# Altium PCB ArduinoUnoR0.PcbDoc (part 2 of 2)
Units mm, origin at the board's own origin, x right, y up, seen from the top; angles counter-clockwise.
Board outline 68.53 x 53.3 mm, 2 copper layers (Top Layer, Bottom Layer); 60 components, 49 nets, 220 pads, 58 vias.
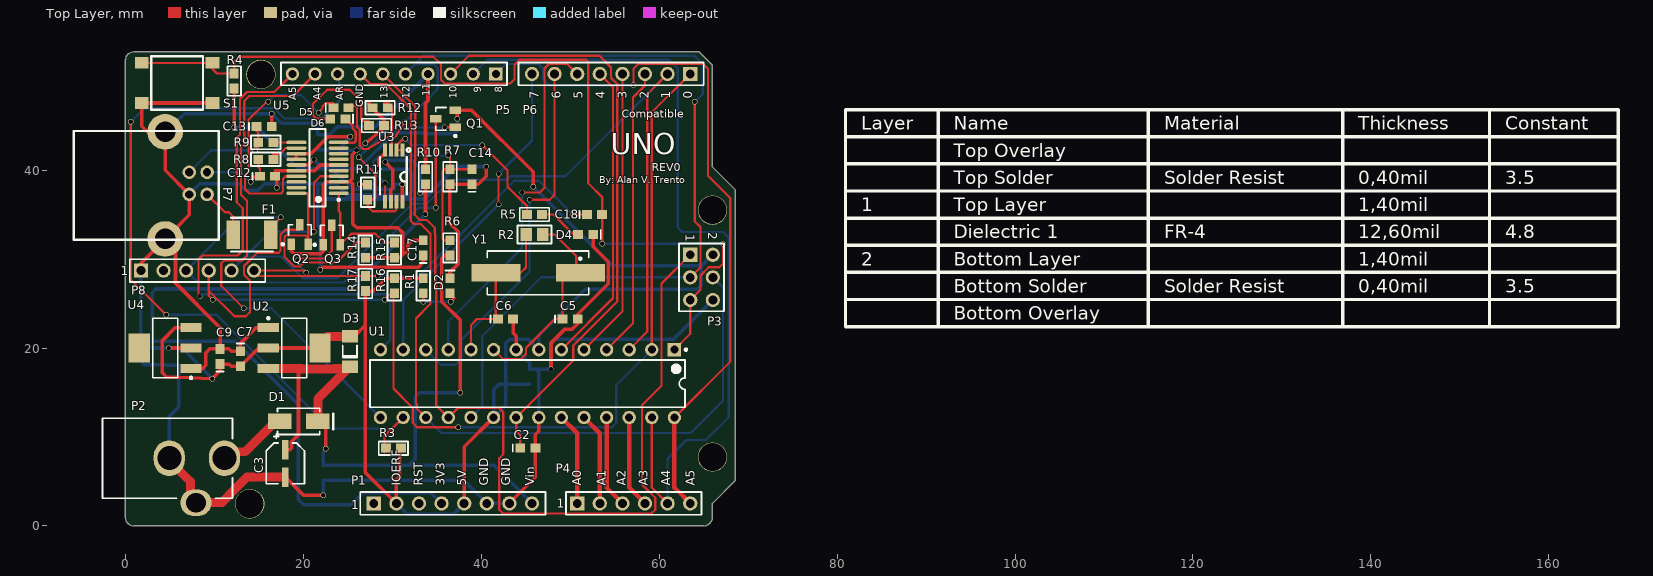
[diagram p0: Top Layer view]

## Via types
v1: diameter 0.61, hole 0.508, Top Layer to Bottom Layer, 58 vias

## Nets (pads, with @x,y where several pads share a name; then routed paths per layer and width w, separated by ;. In a path a pad name is that pad's centre, name@x,y a point inside that pad or via, vN(x,y) a via of type N, cw(c..) or ccw(c..) an arc to the next point about the centre after c; other vN are vias at no path point) (continued)
NetQ2_2: (continued)
  Top Layer w0.254: U5.20 20.473,37.393 20.577,37.289 20.577,32.422 20.58,32.419 20.58,32.34 ; Q2.2 20.58,32.34 ; R14.2 25.985,31.85 23.746,29.611 20.047,29.611 19.609,29.173 18.997,29.173 17.908,30.262 17.908,32.523 18.035,32.65 20.27,32.65 20.58,32.34
NetQ3_2: Q3.2 R15.1 U5.1 | length 12.9
  Top Layer w0.254: U5.1 24,35.401 24.17,35.231 Q3.2 25.423,32.853 28.119,32.853 29.122,31.85 R15.1
NetR5_1: R5.1 U3.1 U3.2 | length 21.3
  Top Layer w0.254: U3.1 U3.2 30.598,42.873 31.157,43.432 31.432,43.432 v1(31.5,43.5) ; v1(40.135,42.81) 42.979,39.965 42.979,38.121 45.15,35.951 R5.1
  Bottom Layer w0.254: v1(31.5,43.5) 32.19,42.81 v1(40.135,42.81)
NetR8_1: R8.1 U5.12 | length 3.5
  Top Layer w0.254: R8.1 16.657,41.844 17.407,41.844 18.035,42.473 U5.12
NetR9_1: R9.1 U5.11 | length 2.6
  Top Layer w0.254: R9.1 U5.11
R\S\T\: C18.2 P3.5 R4.2 S1.2 U1.1 | length 106.6
  Top Layer w0.254: S1.2@1.867,52.034 9.817,52.034 9.817,51.352 10.313,50.856 R4.2 12.25,52.239 12.752,52.741 34.621,52.741 35.485,51.877 35.485,50.15 35.917,49.718 43.283,49.718 43.765,50.201 43.765,51.827 44.32,52.381 51.817,52.381 52.046,52.152 52.046,38.517 53.6,36.963 C18.2 v1(53.6,31.71) ; U1.1 63.5,21.59 P3.5 64.644,26.544 64.644,28.138 65.573,29.067 66.776,29.067 67.184,29.475 v1(67.184,31.71)
  Bottom Layer w0.254: v1(53.6,31.71) v1(67.184,31.71)
RST: P1.3
USB+: F1.2 P8.3 Q1.3 | length 57.6
  Top Layer w0.254: F1.2 16.35,33.53 v1(17.502,34.682) ; v1(34.901,35.764) Q1.3
  Bottom Layer w0.254: v1(17.502,34.682) 12.838,34.682 P8.3 8.187,27.373 24.57,27.373 32.961,35.764 v1(34.901,35.764)
pads on no net: P1.1 P8.2 U4.4 U5.2 U5.5 U5.7 U5.8 U5.9 U5.18 U5.19

## Other copper
Top Layer:

## Silkscreen, mask and mechanical layers (free items; w line width, h text height)
Top Overlay:
  lines w0.381: 80.949,25.454 91.36,25.454 114.976,25.454 136.814,25.454 153.32,25.454 167.794,25.454 ; 80.949,28.502 91.36,28.502 114.976,28.502 136.814,28.502 153.32,28.502 167.794,28.502 ; 80.949,31.55 91.36,31.55 114.976,31.55 136.814,31.55 153.32,31.55 167.794,31.55 ; 80.949,34.598 91.36,34.598 114.976,34.598 136.814,34.598 153.32,34.598 167.794,34.598 ; 80.949,37.646 91.36,37.646 114.976,37.646 136.814,37.646 153.32,37.646 167.794,37.646 ; 80.949,40.694 91.36,40.694 114.976,40.694 136.814,40.694 153.32,40.694 167.794,40.694 ; 80.949,43.742 167.794,43.742 ; 91.36,46.79 91.36,22.406 ; 114.976,46.79 114.976,22.406 ; 136.814,46.79 136.814,22.406 ; 153.32,46.79 153.32,22.406 ; 91.36,22.406 80.949,22.406 80.949,46.79 167.794,46.79 167.794,22.406 153.32,22.406 ; 91.36,22.406 114.976,22.406 ; 114.976,22.406 136.814,22.406 ; 136.814,22.406 153.32,22.406
  text "9" at 39.996,48.67 h0.8 r90
  text "8" at 42.356,48.67 h0.8 r90
  text "11" at 34.246,48.271 h0.8 r90
  text "13" at 29.496,48.004 h0.8 r90
  text "12" at 31.996,48.004 h0.8 r90
  text "10" at 37.246,48.004 h0.8 r90
  text "7" at 46.496,48.004 h1 r90
  text "6" at 48.96,48.004 h1 r90
  text "5" at 51.425,48.004 h1 r90
  text "4" at 53.889,48.004 h1 r90
  text "3" at 56.353,48.004 h1 r90
  text "2" at 58.817,48.004 h1 r90
  text "1" at 61.282,48.004 h1 r90
  text "0" at 63.746,48.004 h1 r90
  text "A5" at 19.246,47.871 h0.8 r90
  text "A4" at 21.996,47.871 h0.8 r90
  text "AR" at 24.496,47.871 h0.8 r90
  text "GND" at 26.746,47.071 h0.8 r90
  text "Compatible" at 55.78,45.521 h1.52
  text "Layer" at 82.727,44.504 h1.52
  text "Name" at 93.138,44.504 h1.52
  text "Material" at 116.754,44.504 h1.52
  text "Thickness" at 138.592,44.504 h1.52
  text "Constant" at 155.098,44.504 h1.52
  text "Top Overlay" at 93.138,41.456 h1.52
  text "UNO" at 54.554,41 h4
  text "REV0" at 59.165,39.517 h1.52
  text "Top Solder" at 93.138,38.408 h1.52
  text "Solder Resist" at 116.754,38.408 h1.52
  text "0,40mil" at 138.592,38.408 h1.52
  text "3.5" at 155.098,38.408 h1.52
  text "By: Alan V. Trento" at 53.25,38.244 h1.3
  text "1" at 82.727,35.36 h1.52
  text "Top Layer" at 93.138,35.36 h1.52
  text "1,40mil" at 138.592,35.36 h1.52
  text "Dielectric 1" at 93.138,32.312 h1.52
  text "FR-4" at 116.754,32.312 h1.52
  text "12,60mil" at 138.592,32.312 h1.52
  text "4.8" at 155.098,32.312 h1.52
  text "2" at 82.727,29.264 h1.52
  text "Bottom Layer" at 93.138,29.264 h1.52
  text "1,40mil" at 138.592,29.264 h1.52
  text "Bottom Solder" at 93.138,26.216 h1.52
  text "Solder Resist" at 116.754,26.216 h1.52
  text "0,40mil" at 138.592,26.216 h1.52
  text "3.5" at 155.098,26.216 h1.52
  text "Bottom Overlay" at 93.138,23.168 h1.52
  text "IOERF" at 30.96,4.504 h1 r90
  text "RST" at 33.425,4.504 h1 r90
  text "3V3" at 35.889,4.504 h1 r90
  text "5V" at 38.353,4.504 h1 r90
  text "GND" at 40.817,4.504 h1 r90
  text "GND" at 43.282,4.504 h1 r90
  text "Vin" at 45.996,4.504 h1 r90
  text "A0" at 51.246,4.504 h1 r90
  text "A1" at 53.996,4.504 h1 r90
  text "A2" at 56.246,4.504 h1 r90
  text "A3" at 58.746,4.504 h1 r90
  text "A4" at 61.246,4.504 h1 r90
  text "A5" at 63.996,4.504 h1 r90
Mechanical 2:
  drawing of 724 lines, arcs and shapes, not listed
Mechanical 3:
  the board outline again, w0.013
Mechanical 4:
  circle w0.006: c0,5.078 r0.003
  circle w0.006: c68.535,5.078 r0.003
  circle w0.006: c0.994,0 r0.003
  circle w0.006: c0.994,53.3 r0.003
Mechanical 15:
  the board outline again, w0.508
Drill Drawing:
  circle w0.254: c84.306,63.61 r0.847
  lines w0.254: 83.459,55.99 84.306,55.143 85.153,55.99 84.306,56.837 83.459,55.99 ; 83.459,59.377 83.883,59.377 83.883,58.953 84.729,58.953 84.729,59.377 85.153,59.377 85.153,60.223 84.729,60.223 84.729,60.647 83.883,60.647 83.883,60.223 83.459,60.223 83.459,59.377 ; 83.459,66.573 84.306,66.997 85.153,66.573 84.729,67.42 85.153,68.267 84.306,67.843 83.459,68.267 83.883,67.42 83.459,66.573 ; 83.459,72.077 85.153,72.077 84.306,70.383 83.459,72.077 ; 83.459,74.193 85.153,74.193 85.153,75.887 83.459,75.887 83.459,74.193 ; 83.459,78.427 83.883,78.427 84.306,78.003 84.729,78.427 85.153,78.427 84.729,78.85 85.153,79.273 84.729,79.273 84.306,79.697 83.883,79.273 83.459,79.273 83.883,78.85 83.459,78.427 ; 83.459,81.813 85.153,81.813 85.153,83.507 83.459,83.507 83.459,81.813 ; 83.798,82.152 84.814,82.152 84.814,83.168 83.798,83.168 83.798,82.152
  lines w0.381: 81.94,54 271.677,54 ; 81.94,84.48 271.677,84.48 ; 95.933,50.19 95.933,88.29 ; 110.915,50.19 110.915,88.29 ; 140.624,50.19 140.624,88.29 ; 153.473,50.19 153.473,88.29 ; 172.112,50.19 172.112,88.29 ; 210.2,50.19 210.2,88.29 ; 225.183,50.19 225.183,88.29 ; 244.126,50.19 244.126,88.29 ; 81.94,50.19 271.677,50.19 271.677,88.29 81.94,88.29 81.94,50.19
  text "Symbol" at 84.226,85.623 h1.83
  text "Count" at 97.076,85.623 h1.83
  text "Hole Size" at 112.058,85.623 h1.83
  text "Plated" at 141.767,85.623 h1.83
  text "Hole Type" at 154.616,85.623 h1.83
  text "Drill Layer Pair" at 173.255,85.623 h1.83
  text "Via/Pad" at 211.343,85.623 h1.83
  text "Pad Shape" at 226.326,85.623 h1.83
  text "Template" at 245.269,85.623 h1.83
  text "58" at 97.076,81.813 h1.52
  text "0,508mm (20,00mil)" at 112.058,81.813 h1.52
  text "PTH" at 141.767,81.813 h1.52
  text "Round" at 154.616,81.813 h1.52
  text "Top Layer - Bottom Layer" at 173.255,81.813 h1.52
  text "Via" at 211.343,81.813 h1.52
  text "Rounded" at 226.326,81.813 h1.52
  text "v61h51" at 245.269,81.813 h1.52
  text "38" at 97.076,78.003 h1.52
  text "0,900mm (35,43mil)" at 112.058,78.003 h1.52
  text "PTH" at 141.767,78.003 h1.52
  text "Round" at 154.616,78.003 h1.52
  text "Top Layer - Bottom Layer" at 173.255,78.003 h1.52
  text "Pad" at 211.343,78.003 h1.52
  text "(Mixed)" at 226.326,78.003 h1.52
  text "(Mixed)" at 245.269,78.003 h1.52
  text "4" at 97.076,74.193 h1.52
  text "0,920mm (36,22mil)" at 112.058,74.193 h1.52
  text "PTH" at 141.767,74.193 h1.52
  text "Round" at 154.616,74.193 h1.52
  text "Top Layer - Bottom Layer" at 173.255,74.193 h1.52
  text "Pad" at 211.343,74.193 h1.52
  text "Rounded" at 226.326,74.193 h1.52
  text "c152h92" at 245.269,74.193 h1.52
  text "34" at 97.076,70.383 h1.52
  text "1,000mm (39,37mil)" at 112.058,70.383 h1.52
  text "PTH" at 141.767,70.383 h1.52
  text "Round" at 154.616,70.383 h1.52
  text "Top Layer - Bottom Layer" at 173.255,70.383 h1.52
  text "Pad" at 211.343,70.383 h1.52
  text "(Mixed)" at 226.326,70.383 h1.52
  text "(Mixed)" at 245.269,70.383 h1.52
  text "1" at 97.076,66.573 h1.52
  text "2,200mm (86,61mil)" at 112.058,66.573 h1.52
  text "PTH" at 141.767,66.573 h1.52
  text "Round" at 154.616,66.573 h1.52
  text "Top Layer - Bottom Layer" at 173.255,66.573 h1.52
  text "Pad" at 211.343,66.573 h1.52
  text "Rounded" at 226.326,66.573 h1.52
  text "r350_300h220r100" at 245.269,66.573 h1.52
  text "2" at 97.076,62.763 h1.52
  text "2,300mm (90,55mil)" at 112.058,62.763 h1.52
  text "PTH" at 141.767,62.763 h1.52
  text "Round" at 154.616,62.763 h1.52
  text "Top Layer - Bottom Layer" at 173.255,62.763 h1.52
  text "Pad" at 211.343,62.763 h1.52
  text "Rounded" at 226.326,62.763 h1.52
  text "c400h230" at 245.269,62.763 h1.52
  text "2" at 97.076,58.953 h1.52
  text "2,700mm (106,30mil)" at 112.058,58.953 h1.52
  text "PTH" at 141.767,58.953 h1.52
  text "Round" at 154.616,58.953 h1.52
  text "Top Layer - Bottom Layer" at 173.255,58.953 h1.52
  text "Pad" at 211.343,58.953 h1.52
  text "Rounded" at 226.326,58.953 h1.52
  text "r350_400h270r100" at 245.269,58.953 h1.52
  text "4" at 97.076,55.143 h1.52
  text "3,150mm (124,02mil)" at 112.058,55.143 h1.52
  text "PTH" at 141.767,55.143 h1.52
  text "Round" at 154.616,55.143 h1.52
  text "Top Layer - Bottom Layer" at 173.255,55.143 h1.52
  text "Pad" at 211.343,55.143 h1.52
  text "Rounded" at 226.326,55.143 h1.52
  text "c330h315" at 245.269,55.143 h1.52
  text "143 Total" at 97.076,51.333 h1.52

## Text inside footprints (layer, text, board x,y; h text height)
P1: Top Overlay "1" at 25.4,1.905 h1
P3: Top Overlay "2" at 65.532,33.02 h1 r270; Top Overlay "1" at 62.992,32.766 h1 r270
P4: Top Overlay "1" at 48.514,2.032 h1
P8: Top Overlay "1" at -0.508,28.194 h1